# EAGLE board LED_USB_Analog_Controller (EAGLE 9.6.2)
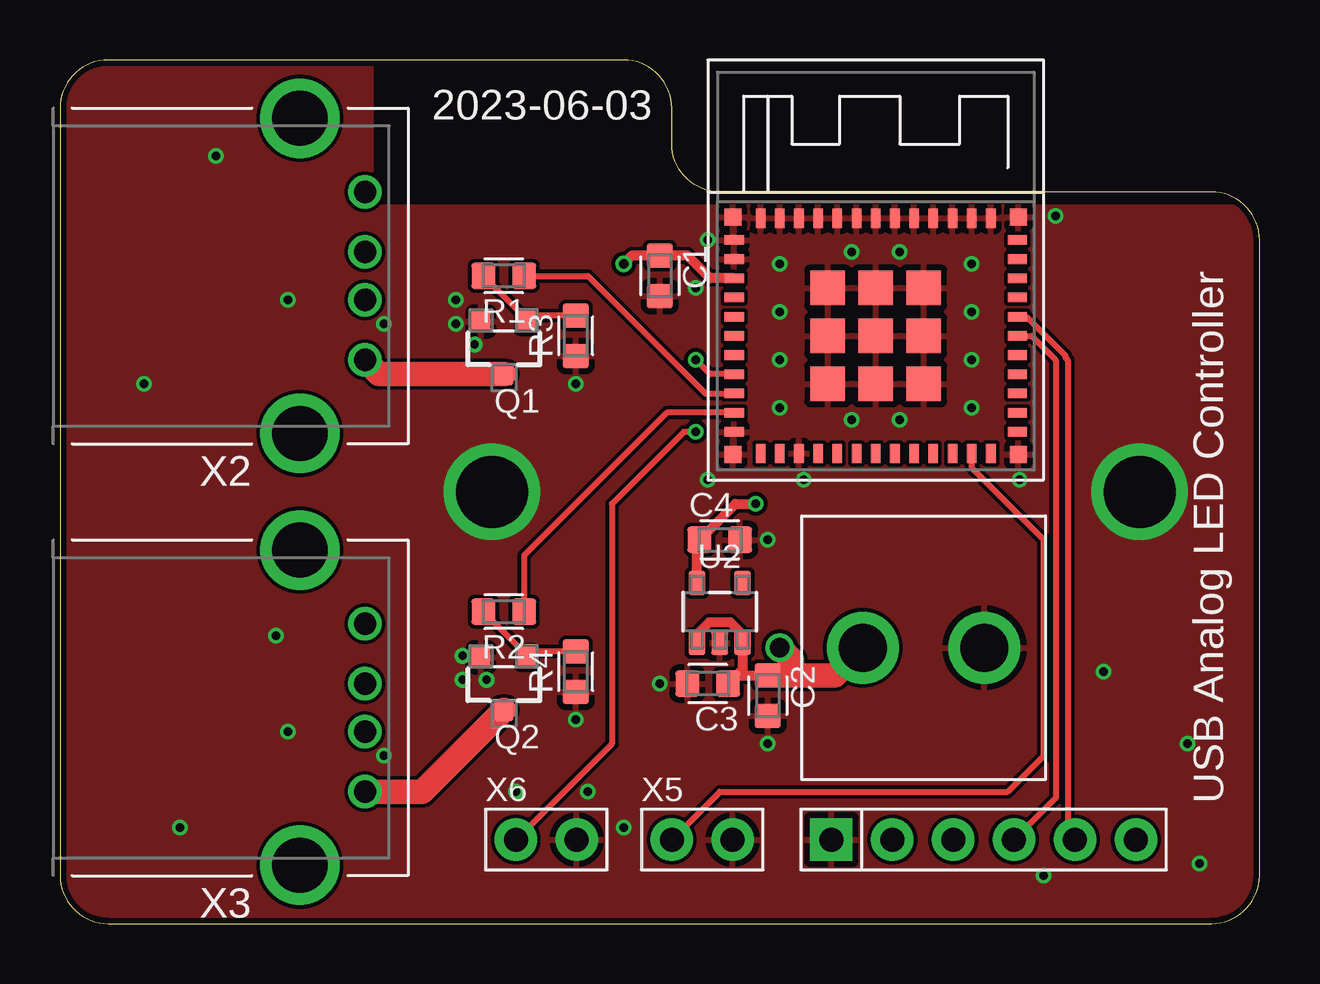
[diagram p0: board, top side]
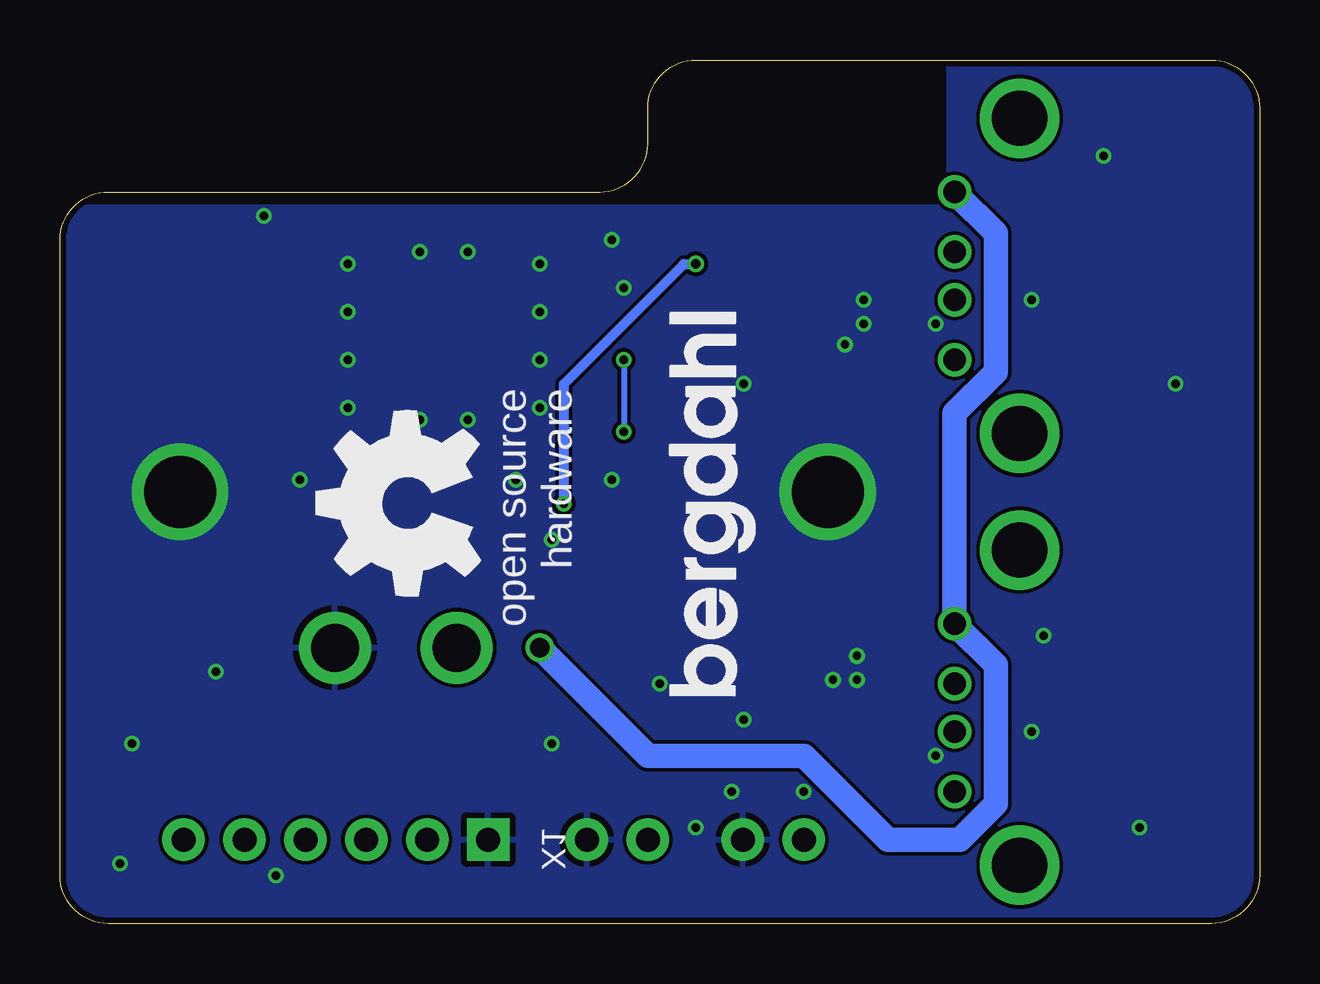
[diagram p1: board, bottom side, seen from below]

Size 50 x 36 mm. Coordinates in mm from the lower left corner, seen from the top.
Outline: 0,34 0,2 arc90 2,0 48,0 arc90 50,2 50,28.5 arc90 48,30.5 27.5,30.5 arc-90 25.5,32.5 25.5,34 arc90 23.5,36 2,36 arc90 0,34
Copper layers (1*16): Top 0.035mm / dielectric 1.5mm / Bottom 0.035mm
Design rules "SeeedStudio_2layer_DRU_no_angle_20140221": minimum track width 6mil, minimum drill 0.3mm, track to track 6mil, track to pad 6mil, pad to pad 6mil, via to via 6mil, smd to smd 0mil, copper to edge 10mil, drill to drill 10mil, minimum pad ring 2mil, minimum via ring 6mil, stop-mask expansion 2mil, vias tented up to drill 1000mil, thermal gap 10mil

## Footprints (pad centres in the part's own frame; a part is rotated, then mirrored left to right if it is on the bottom)
C0603 = smd 1 x 1.1: 1 -0.85,0; 2 0.85,0
TERMINAL-5.08-2P = drill 2: P$1 -2.54,0; P$2 2.54,0
SOT23-3 = smd 0.8 x 0.9: 1 -0.95,-1.1; 2 0.95,-1.1; 3 0,1.1
R0603 = smd 1 x 1.1: 1 -0.85,0; 2 0.85,0
ESP32-PICO-MINI-02 = smd 0.8 x 0.4: 1 -5.9,4; 2 -5.9,3.2; 3 -5.9,2.4; 4 -5.9,1.6; 5 -5.9,0.8; 6 -5.9,0; 7 -5.9,-0.8; 8 -5.9,-1.6; 9 -5.9,-2.4; 10 -5.9,-3.2; 11 -5.9,-4; 25 5.9,-4; 26 5.9,-3.2; 27 5.9,-2.4; 28 5.9,-1.6; 29 5.9,-0.8; 30 5.9,0; 31 5.9,0.8; 32 5.9,1.6; 33 5.9,2.4; 34 5.9,3.2; 35 5.9,4 | smd 0.4 x 0.8: 12 -4.8,-4.9; 13 -4,-4.9; 14 -3.2,-4.9; 15 -2.4,-4.9; 16 -1.6,-4.9; 17 -0.8,-4.9; 18 0,-4.9; 19 0.8,-4.9; 20 1.6,-4.9; 21 2.4,-4.9; 22 3.2,-4.9; 23 4,-4.9; 24 4.8,-4.9; 36 4.8,4.9; 37 4,4.9; 38 3.2,4.9; 39 2.4,4.9; 40 1.6,4.9; 41 0.8,4.9; 42 0,4.9; 43 -0.8,4.9; 44 -1.6,4.9; 45 -2.4,4.9; 46 -3.2,4.9; 47 -4,4.9; 48 -4.8,4.9 | smd 1.45 x 1.45: 49-1 -2,2; 49-2 0,2; 49-3 2,2; 49-4 -2,0; 49-5 0,0; 49-6 2,0; 49-7 -2,-2; 49-8 0,-2; 49-9 2,-2 | smd 0.7 x 0.7: 50 5.95,4.95; 51 5.95,-4.95; 52 -5.95,-4.95; 53 -5.95,4.95
SOT23-5 = smd 0.7 x 1: 1 -0.95,-1.3; 2 0,-1.3; 3 0.95,-1.3; 4 0.95,1.2; 5 -0.95,1.2
FTDI232-1X06 = drill 1 pad 1.778: CTS 0,3.81; DTR 0,-6.35; RX 0,-3.81; TX 0,-1.27; VCC 0,1.27 | drill 1 pad 1.778 square: GND 0,6.35
USB-A-SS-52100-001 = drill 0.92: 1 3.5,-2.71; 2 1,-2.71; 3 -1,-2.71; 4 -3.5,-2.71 | drill 2.3: GND@1 -6.57,0; GND@2 6.57,0
1X02-2.54 = drill 1 pad 1.778: 1 0,0; 2 2.54,0

## Placement (x,y rotation side)
C1  100nF  [C0603]  25,27 270 top
C2  1uF  [C0603]  29.5,9.5 270 top
C3  1uF  [C0603]  27,10 180 top
C4  1uF  [C0603]  27.5,16 0 top
J1  POWER  [TERMINAL-5.08-2P]  36,11.5 0 top
Q1  AO3400  [SOT23-3]  18.5,24 180 top
Q2  AO3400  [SOT23-3]  18.5,10 180 top
R1  100R  [R0603]  18.5,27 180 top
R2  100R  [R0603]  18.5,13 180 top
R3  10K  [R0603]  21.5,24.5 90 top
R4  10K  [R0603]  21.5,10.5 90 top
U1  PICO-MINI-02  [ESP32-PICO-MINI-02]  34,24.5 0 top
U2  AP2112K  [SOT23-5]  27.5,13 0 top
U$1  [BERGDAHL-20MM-BPLACE]  21,25.5 270 top
U$2  [OSHW-8MM-BPLACE]  35.5,17.5 270 top
X1  PROG  [FTDI232-1X06]  38.5,3.5 90 top
X2  LED1  [USB-A-SS-52100-001]  10,27 90 top
X3  LED2  [USB-A-SS-52100-001]  10,9 90 top
X5  BOOT  [1X02-2.54]  25.5,3.5 0 top
X6  RESET  [1X02-2.54]  19,3.5 0 top

## Library data of the parts
C1-C4 R1-R4 = M2M-Passives
J1 X1-X3 X5 X6 = M2M-Connectors
Q1 Q2 = M2M-DiscreteSemi
U1 = M2M-Modules
U2 = M2M-IC
U$1 U$2 = M2M-Frames

## Nets
EN: U1.8 X6.1
GND: C1.2 C2.2 C3.2 C4.2 J1.P$2 Q1.2 Q2.2 R3.1 R4.1 U1.1 U1.2 U1.11 U1.14 U1.36 U1.37 U1.38 U1.39 U1.40 U1.41 U1.42 U1.43 U1.44 U1.45 U1.46 U1.47 U1.48 U1.49-1 U1.49-2 U1.49-3 U1.49-4 U1.49-5 U1.49-6 U1.49-7 U1.49-8 U1.49-9 U1.50 U1.51 U1.52 U1.53 U2.2 X1.GND X5.2 X6.2
IO0: U1.23 X5.1
L1: R1.1 U1.9
L2: R2.1 U1.10
N$1: Q1.3 X2.4
N$2: Q2.3 X3.4
N$3: Q2.1 R2.2 R4.2
N$4: Q1.1 R1.2 R3.2
NC: X1.VCC
RXD0: U1.30 X1.TX
TXD0: U1.31 X1.RX
VCC: C1.1 C4.1 U1.3 U2.5
VIN: C2.1 C3.1 J1.P$1 U2.1 U2.3 X2.1 X3.1

## Tracks (layer width: path | path; a pad name or v marks a point on that pad's centre or on a via)
EN  (via drill 0.35)
  Top 0.254: U1.8 27.1,22.9 v26.5,23.5 | X6.1 23,7.5 23,17.5 26,20.5 v26.5,20.5
  Bottom 0.254: v26.5,23.5 v26.5,20.5
GND  (via drill 0.35, 3)
  other vias: 18,18 45,18 30,27.5 30,25.5 30,23.5 30,21.5 33,21 35,21 38,21.5 38,23.5 38,25.5 38,27.5 35,28 33,28 41.5,29.5 26.5,26.5 27,28.5 40,18.5 31,18.5 27,18.5 47.5,2.5 43.5,10.5 47,7.5 41,2 23.5,4 22,5.5 19,5.5 5,4 9,12 3.5,22.5 6.5,32 16.5,25 16.5,26 17.28,24.14 17.78,10.16 16.78,11.16 16.78,10.16 13.5,7 13.5,25 9.5,26 9.5,8 29.5,16 29.5,7.5 25,10 21.5,8.5 21.5,22.5
  pour Top: 0,36 13,36 13,30 50,30 50,0 0,0
  pour Bottom: 0,36 13,36 13,30 50,30 50,0 0,0
IO0
  Top 0.254: U1.23 38,19 41,16 41,7 39.5,5.5 27.5,5.5 X5.1
L1
  Top 0.254: U1.9 26.9,22.1 22,27 R1.1
L2
  Top 0.254: U1.10 25.3,21.3 19.35,15.35 R2.1
N$1
  Top 1.016: Q1.3 13.31,22.9 X2.4
N$2
  Top 1.016: Q2.3 15.1,5.5 X3.4
N$3
  Top 0.254: R2.2 19.45,11.2 Q2.1 19.7,11.35 R4.2
N$4
  Top 0.254: R1.2 19.45,25.2 Q1.1 19.7,25.35 R3.2
RXD0
  Top 0.254: U1.30 40.5,24.5 41.5,23.5 41.5,5.23 X1.TX
TXD0
  Top 0.254: U1.31 40.27,25.3 41.91,23.67 41.91,23.59 42,23.5 42,3.81 X1.RX
VCC  (via drill 0.35, 0.4)
  Top 0.406: U1.3 27.1,26.9 26.15,27.85 C1.1 23.85,27.85 v23.5,27.5 | U2.5 26.55,15.9 C4.1 28.15,17.5 v29,17.5
  Bottom 0.406: v29,17.5 29,22.5 24,27.5 v23.5,27.5
VIN  (via drill 0.8)
  Top 0.406: C2.1 28.2,10.35 C3.1 28.45,10.6 U2.3 28.45,12.05 27.95,12.56 27.05,12.56 26.55,12.05 U2.1
  Top 1.016: J1.P$1 32.31,10.35 30.5,10.35 | 30.5,10.35 C2.1 | v30,11.5 30.5,11 30.5,10.35
  Bottom 1.016: X2.1 11,28.79 11,23 12.71,21.29 X3.1 11,10.79 11,5 12.5,3.5 15.5,3.5 19,7 25.5,7 v30,11.5

## Text on the board
tPlace: 2023-06-03 | USB Analog LED Controller